# EAGLE board M220X (EAGLE 4.11)
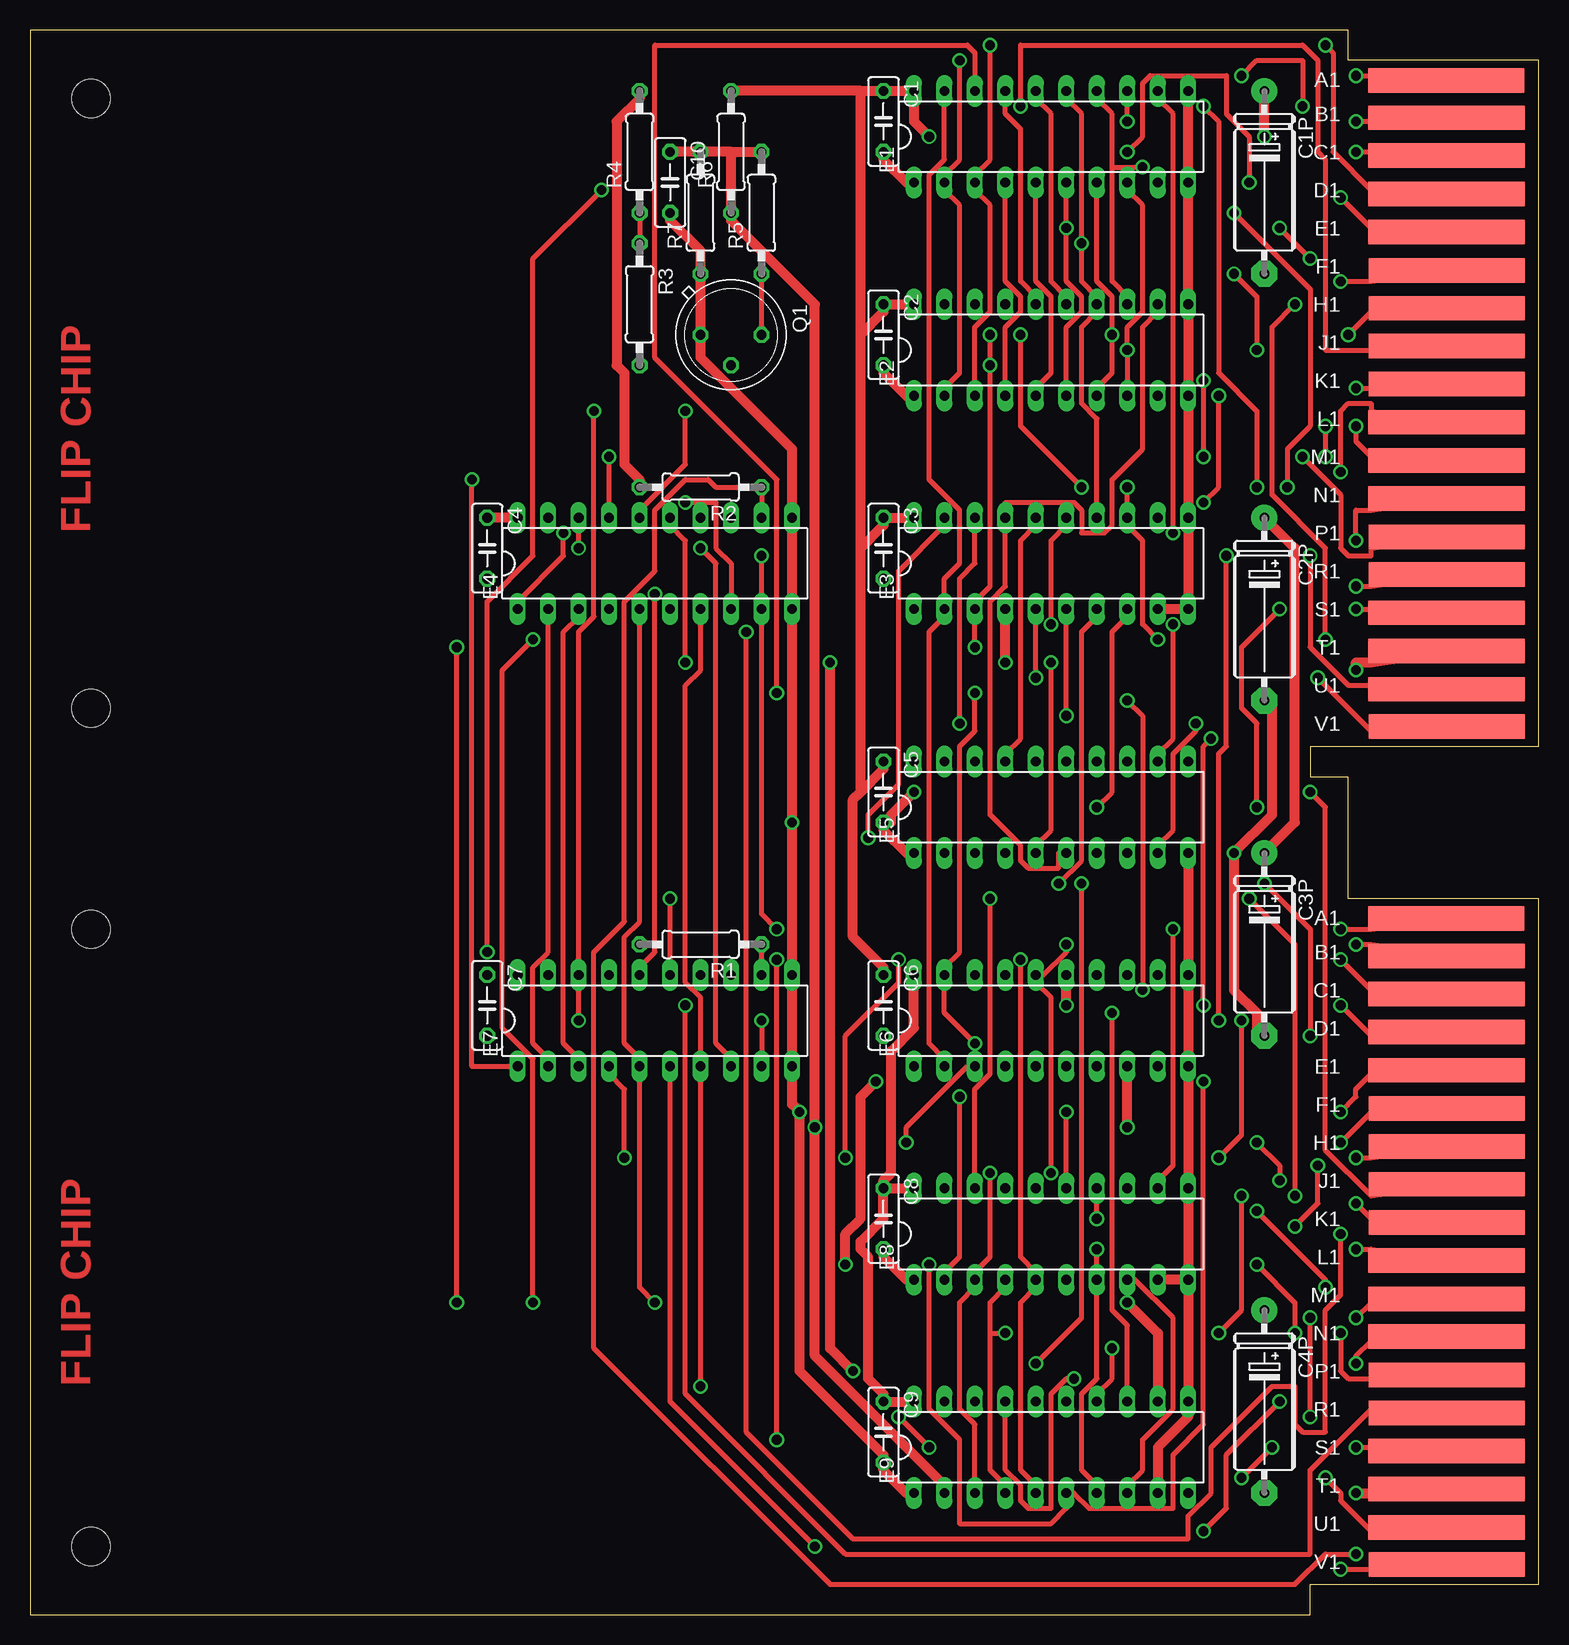
[diagram p0: board, top side]
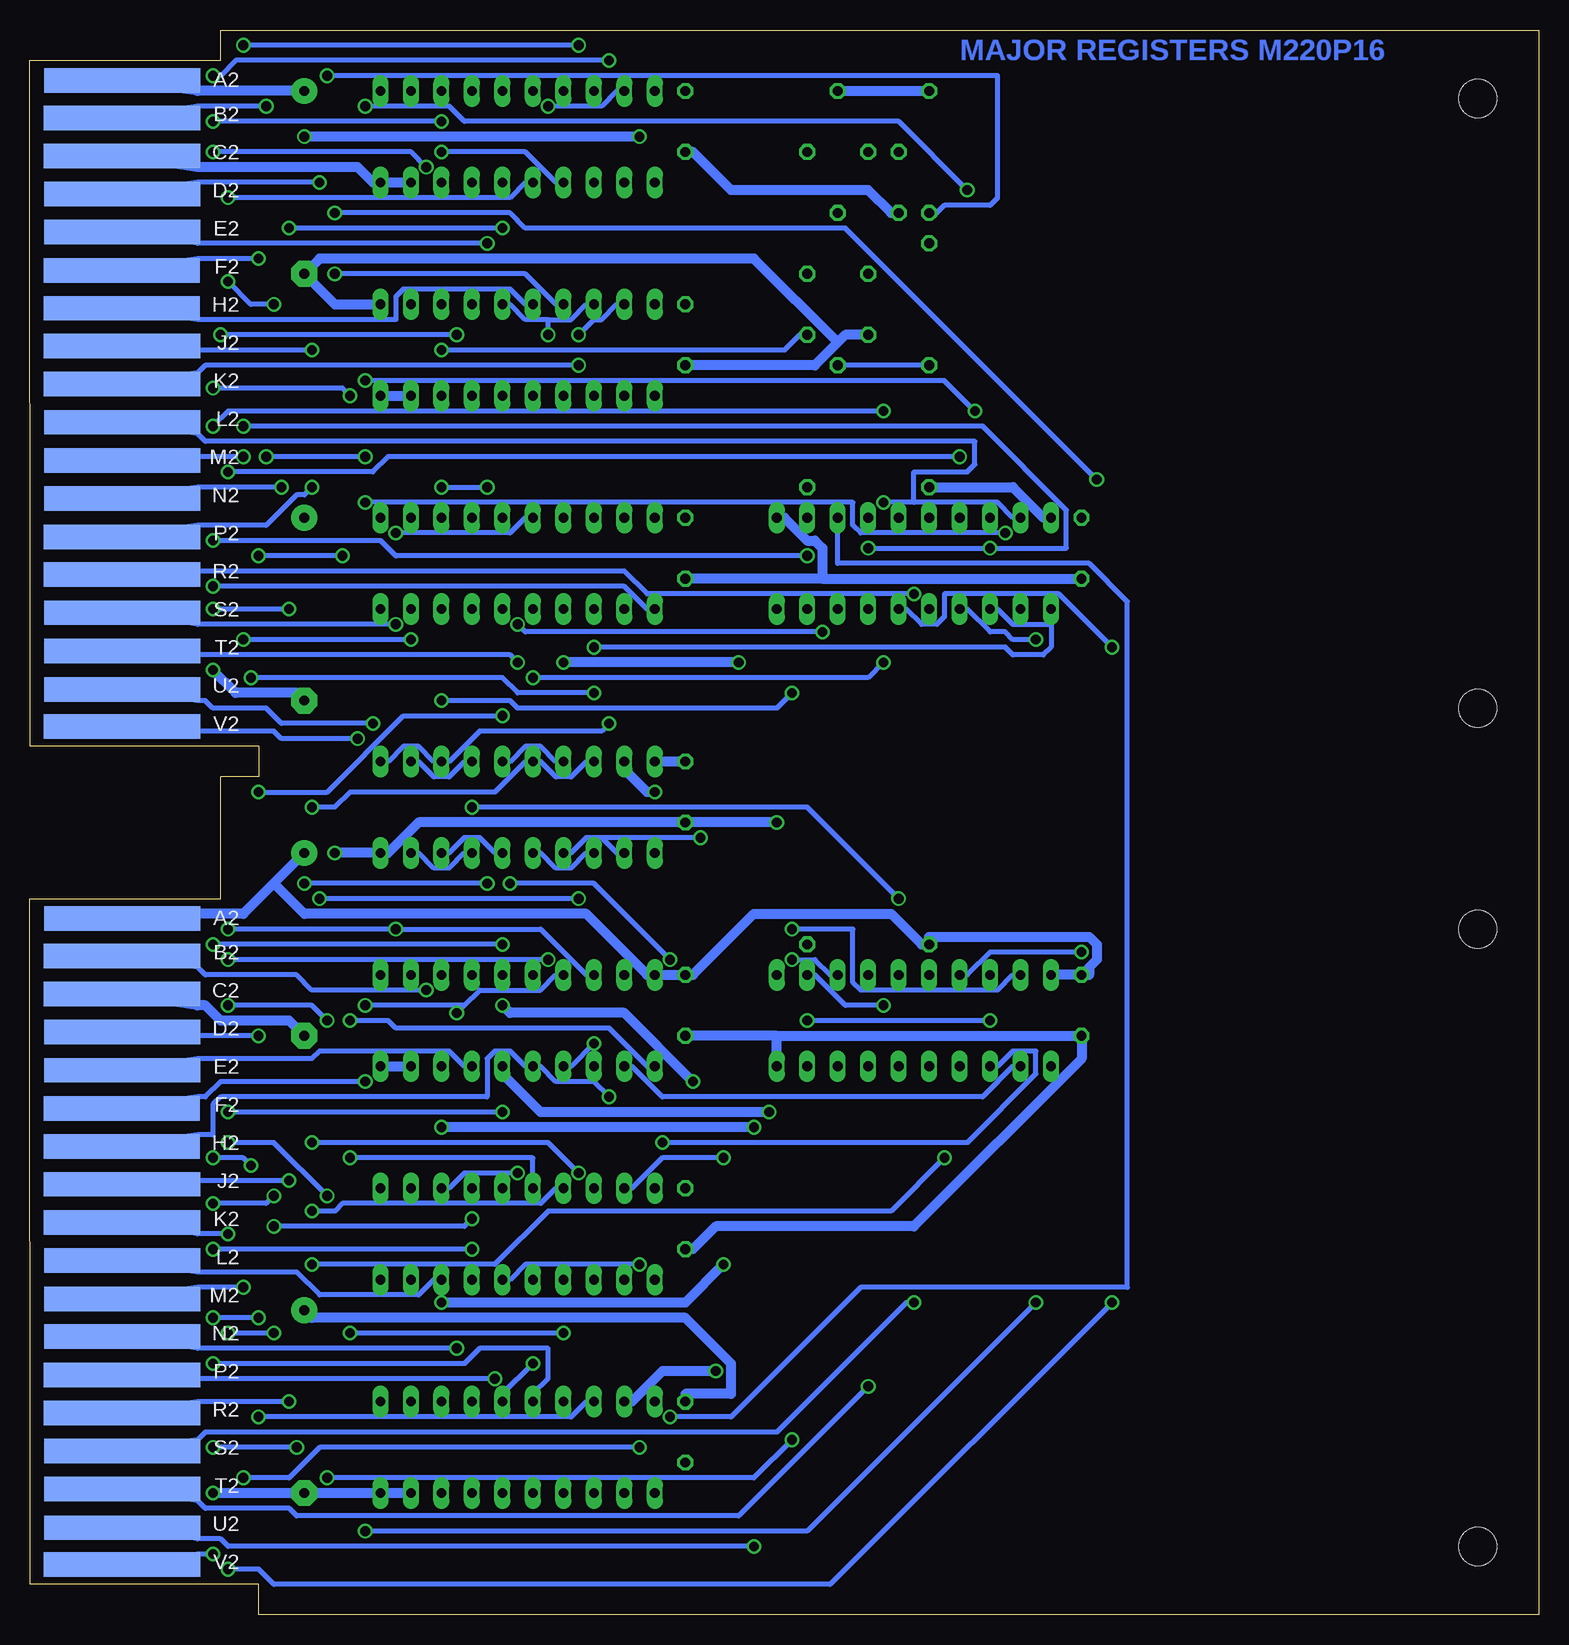
[diagram p1: board, bottom side, seen from below]

Size 125.73 x 132.08 mm. Coordinates in mm from the lower left corner, seen from the top.
Copper layers (1+16): Top 0.035mm / dielectric 1.5mm / Bottom 0.035mm
Design rules "16mils": minimum track width 16mil, minimum drill 32mil, track to track 15mil, track to pad 10mil, pad to pad 10mil, via to via 10mil, smd to smd 10mil, copper to edge 25mil, drill to drill 10mil, minimum pad ring 10mil, minimum via ring 8mil, stop-mask expansion 0mil, vias tented up to drill 0mil, thermal gap 10mil
Net classes: 1 Supply: width 0.813 mm

## Footprints (pad centres in the part's own frame; a part is rotated, then mirrored left to right if it is on the bottom)
C050-025X075 = drill 0.813 octagon: 1 -2.54,0; 2 2.54,0
E15-5 = drill 0.813 pad 2.159 round: + -7.62,0 | drill 0.813 pad 2.159 octagon: - 7.62,0
DIL20 = drill 0.813 long: 1 -11.43,-3.81; 2 -8.89,-3.81; 3 -6.35,-3.81; 4 -3.81,-3.81; 5 -1.27,-3.81; 6 1.27,-3.81; 7 3.81,-3.81; 8 6.35,-3.81; 9 8.89,-3.81; 10 11.43,-3.81; 11 11.43,3.81; 12 8.89,3.81; 13 6.35,3.81; 14 3.81,3.81; 15 1.27,3.81; 16 -1.27,3.81; 17 -3.81,3.81; 18 -6.35,3.81; 19 -8.89,3.81; 20 -11.43,3.81
TO5 = drill 0.813 octagon: 1 0,-2.54; 2 2.54,0; 3 0,2.54
0207/10 = drill 0.813 octagon: 1 -5.08,0; 2 5.08,0
EDGE-CON4 = smd 13.017 x 2.032: AA1 7.709,4.207; AB1 7.684,7.312; AC1 7.684,10.474; AD1 7.684,13.665; AE1 7.693,16.84; AF1 7.668,20.041; AH1 7.668,23.19; AJ1 7.668,26.34; AK1 7.668,29.515; AL1 7.693,32.69; AM1 7.693,35.89; AN1 7.693,39.04; AP1 7.668,42.24; AR1 7.668,45.39; AS1 7.693,48.565; AT1 7.693,51.74; AU1 7.693,54.94; AV1 7.668,58.026; BA1 7.709,74.057; BB1 7.684,77.162; BC1 7.684,80.324; BD1 7.684,83.515; BE1 7.693,86.69; BF1 7.668,89.891; BH1 7.668,93.04; BJ1 7.668,96.19; BK1 7.668,99.365; BL1 7.693,102.54; BM1 7.693,105.74; BN1 7.693,108.89; BP1 7.668,112.09; BR1 7.668,115.24; BS1 7.693,118.415; BT1 7.693,121.59; BU1 7.693,124.79; BV1 7.668,127.876 | smd 13.017 x 2.032 bottom: AA2 7.69,4.207; AB2 7.668,7.328; AC2 7.668,10.49; AD2 7.693,13.665; AE2 7.693,16.84; AF2 7.642,20.041; AH2 7.642,23.19; AJ2 7.668,26.34; AK2 7.668,29.515; AL2 7.693,32.69; AM2 7.693,35.89; AN2 7.693,39.04; AP2 7.668,42.24; AR2 7.668,45.39; AS2 7.693,48.565; AT2 7.693,51.74; AU2 7.693,54.966; AV2 7.668,58.026; BA2 7.69,74.057; BB2 7.668,77.178; BC2 7.668,80.34; BD2 7.693,83.515; BE2 7.693,86.69; BF2 7.642,89.891; BH2 7.642,93.04; BJ2 7.668,96.19; BK2 7.668,99.365; BL2 7.693,102.54; BM2 7.693,105.74; BN2 7.693,108.89; BP2 7.668,112.09; BR2 7.668,115.24; BS2 7.693,118.415; BT2 7.693,121.59; BU2 7.693,124.816; BV2 7.668,127.876
DOUBLE = hole 3.175: 120.65,56.515; 120.65,5.715; 120.65,74.93; 120.65,126.365

## Placement (x,y rotation side)
C1  0.1uf  [C050-025X075]  71.12,124.46 270 top
C1P  6.8uf  [E15-5]  102.87,119.38 270 top
C2  0.1uf  [C050-025X075]  71.12,106.68 270 top
C2P  6.8uf  [E15-5]  102.87,83.82 270 top
C3  0.1uf  [C050-025X075]  71.12,88.9 270 top
C3P  6.8uf  [E15-5]  102.87,55.88 270 top
C4  0.1uf  [C050-025X075]  38.1,88.9 270 top
C4P  6.8uf  [E15-5]  102.87,17.78 270 top
C5  0.1uf  [C050-025X075]  71.12,68.58 270 top
C6  0.1uf  [C050-025X075]  71.12,50.8 270 top
C7  0.1uf  [C050-025X075]  38.1,50.8 270 top
C8  0.1uf  [C050-025X075]  71.12,33.02 270 top
C9  0.1uf  [C050-025X075]  71.12,15.24 270 top
C10  0.1uf  [C050-025X075]  53.34,119.38 270 top
E1  M220A  [DIL20]  85.09,123.19 0 top
E2  M220A  [DIL20]  85.09,105.41 0 top
E3  M220C  [DIL20]  85.09,87.63 0 top
E4  M220B  [DIL20]  52.07,87.63 0 top
E5  74ACT240N  [DIL20]  85.09,67.31 0 top
E6  M220C  [DIL20]  85.09,49.53 0 top
E7  M220B  [DIL20]  52.07,49.53 0 top
E8  M220A  [DIL20]  85.09,31.75 0 top
E9  M220A  [DIL20]  85.09,13.97 0 top
Q1  PN3569  [TO5]  58.42,106.68 270 top
R1  180  [0207/10]  55.88,55.88 180 top
R2  180  [0207/10]  55.88,93.98 180 top
R3  3K 5%  [0207/10]  50.8,109.22 270 top
R4  3K 5%  [0207/10]  50.8,121.92 90 top
R5  3K 5%  [0207/10]  60.96,116.84 90 top
R6  330 5%  [0207/10]  58.42,121.92 90 top
R7  750 5%  [0207/10]  55.88,116.84 90 top
U$1  [EDGE-CON4]  125.73,132.08 180 top
U$2  OUTLINE-DOUBLE  [DOUBLE]  125.73,132.08 180 top
U$3  [FLIPCHIP]  0,0 0 top
U$4  [FLIPCHIP]  0,71.12 0 top

## Library data of the parts
C1 C1P C2 C2P C3 C3P C4 C4P C5-C10 R1-R7 = rcl
E1-E4 E6-E9 = pal
E5 = 74xx-us
Q1 = transistor
U$1-U$4 = dec-con

## Nets
+3V [Supply]: C10.1 E6.8 E9.2 R5.2 R6.1 R7.2
A2: E3.7 E8.19
A3 [Supply]: E3.4 E9.19
AC2_H: E6.18 E8.12 U$1.BA1
AC2_L: E6.16 E8.13 U$1.BB1
AC3_H: E6.4 E6.19 U$1.AV1
AC3_L: E6.17 E9.13 U$1.AV2
AC\_ENABL: E8.3 E9.3 U$1.BJ2
AC_ENABL: E6.5 E8.2 U$1.BH2
ADDER0: E1.13 U$1.AB1
ADDER1: E1.14 E2.13 U$1.AC1
ADDER2: E1.15 E2.14 E3.14 U$1.AE2
ADDER3: E1.16 E2.15 E2.18 E3.13 U$1.AF1
ADDER4: E1.17 E2.16 U$1.AH2
ADDER5: E2.17 U$1.AJ2
AJ1: E1.19 E3.2 E4.2 E6.2 E7.2 U$1.AJ1
AK2: E2.19 E3.3 E4.3 E6.3 E7.3 U$1.AK2
AND: E1.2 E2.2 U$1.AA1
B2: E3.8 E7.15
B3: E3.5 E4.15
BB2: E1.18 U$1.BB2
BE2: E6.7 U$1.BE2
BR2: E4.4 U$1.BR2
BV1: E4.6 U$1.BV1
C2: E3.15 U$1.BK2
CIN: E3.6 U$1.BJ1
DA2: E7.13 U$1.BS1
DA3: E4.13 U$1.BU1
DA_ENABL: E4.7 E7.7 U$1.BT2
DATA2: E8.17 U$1.BM2
DATA3: E9.17 U$1.BP2
DATA_ENABL: E8.7 E9.7 U$1.BL1
GND [Supply]: C1.2 C1P.- C2.2 C2P.- C3.2 C3P.- C4.2 C4P.- C5.2 C6.2 C7.2 C8.2 C9.2 C10.2 E1.1 E1.9 E1.10 E1.11 E2.1 E2.9 E2.10 E2.11 E3.9 E3.10 E3.11 E4.10 E4.11 E5.1 E5.10 E5.19 E6.6 E6.9 E6.10 E6.11 E7.10 E7.11 E8.1 E8.9 E8.10 E8.11 E9.1 E9.9 E9.10 E9.11 Q1.1 R7.1 U$1.AC2 U$1.AT1 U$1.BC2 U$1.BT1
IO2: E8.18 U$1.BK1
IO3: E9.18 U$1.BM1
IO_ENABL: E8.8 E9.8 U$1.BL2
MA2_H: E4.18 E7.8 U$1.AM2
MA2_L: E4.16 U$1.AM1
MA3_H: E4.8 E4.19 U$1.AL2
MA3_L: E4.17 U$1.AL1
MA_ENABL: E7.4 U$1.BP1
MB2_H: E3.18 E5.11 E5.13
MB2_L: E1.12 E3.16 E5.15 E5.17
MB3_H: E3.19 E5.2 E5.4
MB3_L: E2.12 E3.17 E5.6 E5.8
MEM2: E7.12 R1.1 U$1.BR1
MEM3: E4.12 R2.1 U$1.BV2
MEM_ENABL: E7.6 U$1.BU2
MQ2_H: E8.14 U$1.BH1
MQ3_H: E9.14 U$1.BN2
MQ_ENABL: E8.4 E9.4 U$1.BF1
N$1: E7.1 U$1.AN2
N$2: E4.1 U$1.AK1
N$3: E3.1 U$1.AR1
N$4: E6.1 U$1.AU1
N$5 [Supply]: E6.15 E9.12
N$6: E5.12 E5.14 U$1.AS2
N$7: E5.16 E5.18 U$1.AS1
N$8: E5.3 E5.5 U$1.AT2
N$9: E5.7 E5.9 U$1.AU2
N$10: Q1.2 R3.2
NO_SHIFT: E1.5 E2.5 U$1.AE1
PC2_H: E7.9 E7.18 U$1.AP1
PC2_L: E7.16 U$1.AR2
PC3_H: E4.9 E7.19 U$1.AN1
PC3_L: E7.17 U$1.AP2
PC_ENABL: E4.5 E7.5 U$1.BS2
SC2: E8.16 U$1.BD1
SC3: E9.16 U$1.BN1
SC_ENABL: E8.6 E9.6 U$1.BF2
SHIFT_L1: E1.6 E2.6 U$1.AF2
SHIFT_L2: E1.7 E2.7 U$1.AH1
SHIFT_R1: E1.4 E2.4 U$1.AD2
SHIFT_R2: E1.3 E2.3 U$1.AD1
SR2: E8.15 U$1.BE1
SR3: E9.15 U$1.BD2
SR_ENABL: E8.5 E9.5 U$1.BC1
TT_SHIFT: E1.8 E2.8 Q1.3 R5.1
TT_SHIFT_L: R3.1 R4.1 U$1.AB2
VCC [Supply]: C1.1 C1P.+ C2.1 C2P.+ C3.1 C3P.+ C4.1 C4P.+ C5.1 C6.1 C7.1 C8.1 C9.1 E1.20 E2.20 E3.20 E4.20 E5.20 E6.20 E7.20 E8.20 E9.20 R1.2 R2.2 R4.2 R6.2 U$1.AA2 U$1.BA2

## Tracks (layer width: path | path; a pad name or v marks a point on that pad's centre or on a via)
+3V  (via drill 0.81)
  Top 0.813: C10.1 R7.2 58.42,121.92 | 58.42,121.92 R5.2 | E9.2 76.2,10.79 65.41,21.59 v65.41,40.64 65.41,109.22 58.42,116.2 R6.1 58.42,121.92 | v91.44,40.64 E6.8
  Bottom 0.813: v65.41,40.64 v91.44,40.64
A2  (via drill 0.81)
  Top 0.406: v67.94,38.1 67.94,48.26 72.39,52.7 v72.39,54.61 | v85.72,60.96 87.63,62.87 87.63,81.92 88.9,83.19 E3.7
  Bottom 0.406: v67.94,38.1 73.03,38.1 75.56,35.56 E8.19 | v72.39,54.61 78.74,60.96 v85.72,60.96
A3  (via drill 0.81)
  Top 0.813: v68.58,20.32 66.67,22.23 v66.67,79.38 | v81.28,79.38 E3.4
  Bottom 0.813: v68.58,20.32 73.03,20.32 75.56,17.78 E9.19 | v66.67,79.38 v81.28,79.38
AC2_H  (via drill 0.81)
  Top 0.406: v109.22,57.15 111.76,57.15 U$1.BA1 | v95.25,57.15 95.25,37.47 93.98,36.2 E8.12
  Bottom 0.406: v109.22,57.15 v95.25,57.15 83.19,57.15 79.38,53.34 E6.18
AC2_L  (via drill 0.81)
  Top 0.406: v85.09,36.83 85.09,51.44 83.82,52.7 E6.16 84.45,53.34 86.36,55.24 v86.36,55.88 | v110.49,55.88 111.76,55.88 U$1.BB1
  Bottom 0.406: v85.09,36.83 89.53,36.83 90.81,35.56 E8.13 | v86.36,55.88 v110.49,55.88
AC3_H  (via drill 0.81)
  Top 0.406: v78.74,47.62 76.2,50.16 E6.19 76.2,53.98 77.47,55.24 77.47,72.39 78.74,73.66 v78.74,76.83 | v107.31,78.11 111.76,73.66 U$1.AV1
  Bottom 0.406: v78.74,47.62 80.64,45.72 E6.4 | v78.74,76.83 85.09,76.83 86.36,78.11 v107.31,78.11
AC3_L  (via drill 0.81)
  Top 0.406: v90.17,50.16 90.17,25.4 91.44,24.13 E9.13 | v98.42,73.03 97.79,72.39 v97.79,50.8
  Bottom 0.406: 89.53,50.8 88.27,52.07 83.19,52.07 81.92,53.34 E6.17 | v90.17,50.16 89.53,50.8 | v98.42,73.03 104.78,73.03 105.41,73.66 111.76,73.66 U$1.AV2 | 89.53,50.8 v97.79,50.8
AC\_ENABL  (via drill 0.81)
  Top 0.406: E9.3 78.74,15.88 77.47,17.14 77.47,26.04 78.74,27.3 E8.3 78.74,28.57 80.01,29.84 v80.01,36.83 | v102.23,39.37 104.14,37.47 v104.14,36.2
  Bottom 0.406: v80.01,36.83 82.55,39.37 v102.23,39.37 | v104.14,36.2 111.76,36.2 U$1.BJ2
AC_ENABL  (via drill 0.81)
  Top 0.406: v77.47,43.18 77.47,29.84 76.2,28.57 E8.2
  Bottom 0.406: v77.47,43.18 78.74,44.45 81.92,44.45 83.19,45.72 E6.5 84.45,45.72 85.72,46.99 87,46.99 87.63,46.35 87.63,43.18 109.86,43.18 110.49,42.55 110.49,40.01 111.76,40.01 U$1.BH2
ADDER0  (via drill 0.81)
  Top 0.406: v110.49,124.46 111.76,124.46 U$1.AB1 | v91.44,124.46 E1.13
  Bottom 0.406: v91.44,124.46 v110.49,124.46
ADDER1  (via drill 0.81)
  Top 0.406: 90.17,120.65 90.17,125.09 88.9,126.36 E1.14 | 90.17,120.65 90.17,111.12 91.44,109.86 E2.13 | 90.17,120.65 v92.71,120.65 | v110.49,121.92 111.76,121.92 U$1.AC1
  Bottom 0.406: v92.71,120.65 93.98,121.92 v110.49,121.92
ADDER2  (via drill 0.81)
  Top 0.406: E3.14 88.9,99.69 87.63,100.97 87.63,107.31 88.9,108.58 E2.14 88.9,109.86 87.63,111.12 v87.63,114.3 87.63,125.09 86.36,126.36 E1.15
  Bottom 0.406: v87.63,114.3 111.76,114.3 U$1.AE2
ADDER3  (via drill 0.81)
  Top 0.406: v87.63,93.98 82.55,99.06 v82.55,106.68 | v91.44,93.98 E3.13 91.44,90.81 92.71,89.53 92.71,82.55 v93.98,81.28 | E1.16 83.82,126.36 85.09,125.09 85.09,111.12 86.36,109.86 E2.15 | v109.22,111.12 111.76,111.12 U$1.AF1 | v105.41,109.22 103.5,107.31 103.5,93.34 107.95,88.9 v107.95,81.28
  Bottom 0.406: 82.55,107.95 84.45,107.95 85.72,109.22 E2.15 | 82.55,107.95 80.64,107.95 79.38,109.22 E2.18 | v91.44,93.98 v87.63,93.98 | v82.55,106.68 82.55,107.95 | v109.22,111.12 107.31,109.22 v105.41,109.22 | v93.98,81.28 v107.95,81.28
ADDER4
  Top 0.406: E2.16 83.82,109.86 82.55,111.12 82.55,123.83 81.28,125.09 E1.17
  Bottom 0.406: E2.16 84.45,109.22 85.72,110.49 94.61,110.49 95.25,109.86 95.25,107.95 111.76,107.95 U$1.AH2
ADDER5  (via drill 0.81)
  Top 0.406: v100.33,111.76 102.23,109.86 v102.23,105.41
  Bottom 0.406: v100.33,111.76 84.45,111.76 81.92,109.22 E2.17 | v102.23,105.41 111.76,105.41 U$1.AJ2
AJ1  (via drill 0.81)
  Top 0.406: E4.2 43.18,55.24 41.91,53.98 41.91,47.62 43.18,46.35 E7.2 | E6.2 76.2,46.35 74.93,47.62 74.93,81.92 76.2,83.19 E3.2 76.2,86.36 77.47,87.63 77.47,92.08 74.93,94.61 74.93,120.02 76.2,121.28 E1.19 | v82.55,125.73 82.55,130.81 106.05,130.81 107.31,129.54 107.31,121.92 107.95,121.28 107.95,105.41 111.76,105.41 U$1.AJ1
  Bottom 0.406: E7.2 43.81,45.72 46.35,43.18 73.03,43.18 75.56,45.72 E6.2 | v82.55,125.73 78.11,125.73 76.83,127 E1.19
AK2  (via drill 0.81)
  Top 0.406: v80.01,106.68 v80.01,104.14 80.01,85.72 78.74,84.45 E3.3 v78.74,80.64 | E7.3 45.72,46.35 44.45,47.62 44.45,81.92 45.72,83.19 E4.3 | v73.03,39.37 73.03,40.64 78.11,45.72 E6.3
  Bottom 0.406: v80.01,106.68 78.74,107.95 78.11,107.95 76.83,109.22 E2.19 | v80.01,104.14 111.12,104.14 111.76,103.5 U$1.AK2 | v73.03,39.37 47.62,39.37 41.91,45.09 41.91,46.99 43.81,46.99 45.09,45.72 E7.3 | v78.74,80.64 44.45,80.64 43.81,80.01 41.27,80.01 40.64,80.64 40.64,82.55 43.81,82.55 45.09,83.82 E4.3
AND  (via drill 0.81)
  Top 0.406: E2.2 76.2,102.23 77.47,103.5 77.47,117.47 76.2,118.75 E1.2 76.2,120.02 77.47,121.28 v77.47,129.54 | v110.49,128.27 111.76,128.27 U$1.AA1
  Bottom 0.406: v77.47,129.54 108.58,129.54 109.86,128.27 v110.49,128.27
B2  (via drill 0.81)
  Top 0.406: v88.9,67.31 90.17,68.58 90.17,81.92 91.44,83.19 E3.8 | E7.15 v53.34,59.69
  Bottom 0.406: v53.34,59.69 60.96,67.31 v88.9,67.31
B3  (via drill 0.81)
  Top 0.406: v54.61,79.38 54.61,89.53 53.34,90.81 E4.15 | v83.82,78.11 E3.5
  Bottom 0.406: v54.61,79.38 55.88,78.11 v83.82,78.11
BB2  (via drill 0.81)
  Top 0.406: v62.23,76.83 62.23,94.61 52.07,104.78 52.07,130.81 78.11,130.81 78.74,130.18 E1.18 | v91.44,76.2 92.71,74.93 v92.71,52.07
  Bottom 0.406: v62.23,76.83 63.5,75.56 85.09,75.56 85.72,76.2 v91.44,76.2 | v92.71,52.07 102.23,52.07 103.5,53.34 111.12,53.34 111.76,53.98 U$1.BB2
BE2
  Bottom 0.406: E6.7 89.53,45.72 90.81,46.99 101.6,46.99 102.23,46.35 111.76,46.35 U$1.BE2
BR2  (via drill 0.81)
  Top 0.406: v41.91,81.28 39.37,78.74 39.37,48.9 41.91,46.35 v41.91,26.04 | v97.79,6.99 99.69,8.89 99.69,13.34 v104.14,17.78
  Bottom 0.406: v41.91,81.28 43.81,81.28 44.45,81.92 45.72,81.92 47.62,83.82 E4.4 | v41.91,26.04 60.96,6.99 v97.79,6.99 | v104.14,17.78 111.76,17.78 U$1.BR2
BV1  (via drill 0.81)
  Top 0.406: v35.56,26.04 v35.56,80.64 | v109.22,3.81 111.76,3.81 U$1.BV1
  Bottom 0.406: v35.56,80.64 40.01,85.09 49.53,85.09 49.53,83.19 50.16,82.55 51.44,82.55 52.7,83.82 E4.6 | v35.56,26.04 59.05,2.54 105.41,2.54 106.68,3.81 v109.22,3.81
C2  (via drill 0.81)
  Top 0.406: v85.09,82.55 85.09,89.53 86.36,90.81 E3.15 | v59.69,81.92 59.69,15.24 68.58,6.35 96.52,6.35 96.52,8.26 98.42,10.16 98.42,13.97 103.5,19.05 105.41,19.05 105.41,15.88 106.05,15.24 107.95,15.24 107.95,25.4 109.22,26.67 v109.22,31.75
  Bottom 0.406: v85.09,82.55 84.45,81.92 v59.69,81.92 | v109.22,31.75 111.76,31.75 U$1.BK2
CIN  (via drill 0.81)
  Top 0.406: v106.68,68.58 107.95,67.31 107.95,38.73 111.76,34.92 U$1.BJ1 | v86.36,74.93 E3.6
  Bottom 0.406: v86.36,74.93 94.61,74.93 100.97,68.58 v106.68,68.58
DA2  (via drill 0.81)
  Top 0.406: v62.23,14.61 v62.23,54.61 | v100.97,11.43 v103.5,13.97 | v110.49,13.97 111.76,13.97 U$1.BS1
  Bottom 0.406: v62.23,54.61 60.33,54.61 59.05,53.34 E7.13 | v62.23,14.61 65.41,11.43 v100.97,11.43 | v103.5,13.97 v110.49,13.97
DA3  (via drill 0.81)
  Top 0.406: v72.39,16.51 v74.93,13.97 | v107.95,11.43 109.22,10.16 109.22,9.53 111.76,6.99 U$1.BU1
  Bottom 0.406: v72.39,16.51 67.31,16.51 56.52,27.3 34.29,27.3 34.29,84.45 37.47,87.63 58.42,87.63 E4.13 | v74.93,13.97 101.6,13.97 104.14,11.43 v107.95,11.43
DA_ENABL  (via drill 0.81)
  Top 0.406: E4.7 55.88,78.74 54.61,77.47 54.61,52.7 55.88,51.44 E7.7 v55.88,19.05
  Bottom 0.406: v55.88,19.05 66.67,8.26 103.5,8.26 104.14,8.89 111.12,8.89 111.76,9.53 U$1.BT2
DATA2  (via drill 0.81)
  Top 0.406: v102.23,33.66 107.95,27.94 v107.95,27.3
  Bottom 0.406: v102.23,33.66 100.33,33.66 99.69,34.29 83.19,34.29 81.92,35.56 E8.17 | v107.95,27.3 111.76,27.3 U$1.BM2
DATA3  (via drill 0.81)
  Top 0.406: v87,19.68 86.36,19.68 85.09,18.41 85.09,8.89 83.19,8.89 82.55,9.53 82.55,10.79 81.28,12.06 E9.17
  Bottom 0.406: v87,19.68 111.76,19.68 U$1.BP2
DATA_ENABL  (via drill 0.81)
  Top 0.406: E9.7 88.9,10.79 87.63,12.06 87.63,18.41 88.9,19.68 E8.7 v88.9,30.48 | v110.49,30.48 111.76,30.48 U$1.BL1
  Bottom 0.406: v88.9,30.48 v110.49,30.48
GND  (via drill 0.81)
  Top 0.813: C2P.- 103.5,75.56 103.5,66.67 v100.33,63.5 100.33,52.07 102.23,50.16 102.23,48.9 C3P.- | v110.49,78.74 110.49,79.38 111.76,79.38 U$1.AT1 | E5.1 73.03,63.5 71.12,65.41 C5.2 71.75,66.04 71.75,66.67 v73.66,68.58 | E5.10 E6.11 E6.10 E8.11 E8.10 | E8.10 E8.9 | E8.10 E9.11 96.52,16.51 93.98,13.97 E9.9 | v110.49,10.16 111.76,10.16 U$1.BT1 | E1.11 E1.10 E2.11 E2.10 E3.11 E3.10 E3.9 | E1.1 73.03,119.38 71.12,121.28 C1.2 | C2.2 71.12,103.5 73.03,101.6 E2.1 | C10.2 53.34,116.2 55.88,113.67 R7.1 Q1.1 55.88,104.78 63.5,97.16 E4.11 E4.10 v63.5,66.04 E7.11 E7.10 63.5,42.55 v64.14,41.91 64.14,20.32 71.12,13.34 C9.2 71.12,12.06 73.03,10.16 E9.1 | E8.1 73.03,27.94 71.12,29.84 C8.2
  Bottom 0.813: C3P.- 104.14,49.53 109.86,49.53 111.12,50.8 111.76,50.8 U$1.BC2 | v110.49,78.74 108.58,76.83 103.5,76.83 C2P.- | v73.66,68.58 74.3,68.58 76.2,70.48 E5.19 | E6.10 E6.9 | E9.9 E9.10 C4P.- v110.49,10.16 | v100.33,63.5 E5.10 95.89,63.5 93.34,66.04 C5.2 v63.5,66.04 | E1.9 E1.10 97.16,119.38 98.42,120.65 111.76,120.65 U$1.AC2 | E2.10 E2.9 | E2.11 100.33,109.22 C1P.- 101.6,113.03 65.41,113.03 58.42,106.05 | 59.69,86.36 C4.2 | 59.69,86.36 C3.2 | 59.69,86.36 59.69,88.9 60.33,89.53 60.96,89.53 62.87,91.44 E4.11 | 58.42,106.05 57.78,106.68 Q1.1 | 58.42,106.05 60.33,104.14 C2.2 | C1.2 70.48,121.92 67.31,118.75 55.88,118.75 53.98,116.84 C10.2 | 63.5,48.26 C7.2 38.1,46.35 52.07,32.38 68.58,32.38 70.48,30.48 C8.2 | 63.5,48.26 C6.2 | v64.14,41.91 83.19,41.91 86.36,45.09 E6.6 | E7.10 63.5,48.26
IO2  (via drill 0.81)
  Top 0.406: v80.01,59.69 80.01,45.09 78.74,43.81 E8.18 | v101.6,59.69 105.41,55.88 v105.41,34.92 | v110.49,34.29 111.76,33.02 U$1.BK1
  Bottom 0.406: v80.01,59.69 v101.6,59.69 | v105.41,34.92 106.05,34.29 v110.49,34.29
IO3  (via drill 0.81)
  Top 0.406: v106.68,16.51 v106.68,24.77 | v110.49,24.77 111.76,26.04 U$1.BM1
  Bottom 0.406: v106.68,16.51 80.64,16.51 79.38,17.78 E9.18 | v106.68,24.77 v110.49,24.77
IO_ENABL
  Top 0.406: E9.8 91.44,10.79 92.71,12.06 92.71,14.61 95.25,17.14 95.25,24.77 92.08,27.94 E8.8
  Bottom 0.406: E8.8 92.08,27.94 93.34,26.67 101.6,26.67 103.5,28.57 111.76,28.57 U$1.BL2
MA2_H  (via drill 0.81)
  Top 0.406: v55.88,88.9 57.15,87.63 57.15,47.62 58.42,46.35 E7.8 | v45.72,88.9 E4.18 | v107.95,99.06 v107.95,96.52
  Bottom 0.406: v55.88,88.9 v45.72,88.9 39.37,88.9 39.37,92.08 46.35,99.06 v107.95,99.06 | v107.95,96.52 111.76,96.52 U$1.AM2
MA2_L  (via drill 0.81)
  Top 0.406: v54.61,100.33 54.61,95.89 50.8,92.08 E4.16 | v110.49,99.06 110.49,97.79 111.76,96.52 U$1.AM1
  Bottom 0.406: v54.61,100.33 109.22,100.33 v110.49,99.06
MA3_H  (via drill 0.81)
  Top 0.406: v54.61,92.71 57.15,92.71 57.15,88.9 58.42,87.63 E4.8
  Bottom 0.406: 52.07,92.71 v54.61,92.71 | 52.07,92.71 45.09,92.71 43.81,91.44 E4.19 | 52.07,92.71 52.07,95.25 47.62,95.25 46.99,95.89 46.99,97.79 111.12,97.79 111.76,98.42 U$1.AL2
MA3_L  (via drill 0.81)
  Top 0.406: v109.22,95.25 109.22,100.33 109.86,100.97 111.76,100.97 111.76,100.33 U$1.AL1 | E4.17 v48.26,96.52
  Bottom 0.406: v48.26,96.52 95.89,96.52 97.16,95.25 v109.22,95.25
MA_ENABL  (via drill 0.81)
  Top 0.406: v49.53,38.1 49.53,43.81 48.26,45.09 E7.4 | v102.23,29.21 105.41,26.04 v105.41,23.5 | v109.22,23.5 109.22,20.32 109.86,19.68 111.76,19.68 U$1.BP1
  Bottom 0.406: v49.53,38.1 53.98,33.66 82.55,33.66 87,29.21 v102.23,29.21 | v105.41,23.5 v109.22,23.5
MB2_H  (via drill 0.81)
  Top 0.406: v77.47,74.3 77.47,86.36 78.74,87.63 E3.18
  Bottom 0.406: E5.11 95.89,71.12 94.61,72.39 93.34,72.39 92.08,71.12 E5.13 90.81,71.12 88.27,73.66 78.11,73.66 v77.47,74.3
MB2_L  (via drill 0.81)
  Top 0.406: E3.16 83.82,90.81 82.55,89.53 82.55,73.03 81.28,71.75 E5.17 | v95.25,90.17 95.25,125.09 93.98,126.36 E1.12
  Bottom 0.406: E5.17 81.92,71.12 83.19,72.39 84.45,72.39 85.72,71.12 E5.15 | v95.25,90.17 85.72,90.17 84.45,91.44 E3.16
MB3_H  (via drill 0.81)
  Top 0.406: v69.85,64.77 69.85,66.67 72.39,69.22 72.39,87 76.2,90.81 E3.19
  Bottom 0.406: 78.11,64.77 76.83,63.5 E5.2 | 78.11,64.77 79.38,64.77 80.64,63.5 E5.4 | v69.85,64.77 78.11,64.77
MB3_L
  Top 0.406: E5.6 85.72,63.5 85.72,62.23 83.19,62.23 82.55,62.87 82.55,64.14 80.01,66.67 80.01,84.45 81.28,85.72 E3.17 81.28,92.71 87,92.71 87.63,92.08 87.63,90.17 89.53,90.17 90.17,90.81 90.17,94.61 92.71,97.16 92.71,107.31 93.98,108.58 E2.12
  Bottom 0.406: E5.8 90.81,63.5 89.53,64.77 88.27,64.77 87,63.5 E5.6
MEM2  (via drill 0.81)
  Top 0.406: E7.12 R1.1 | v54.61,50.8 54.61,18.41 67.94,5.08 106.68,5.08 106.68,12.06 111.76,17.14 U$1.BR1
  Bottom 0.406: v54.61,50.8 57.78,50.8 60.33,53.34 E7.12
MEM3  (via drill 0.81)
  Top 0.406: E4.12 R2.1 57.15,93.98 56.52,94.61 54.61,94.61 52.07,92.08 52.07,87 49.53,84.45 49.53,57.78 46.99,55.24 46.99,22.23 66.67,2.54 105.41,2.54 107.95,5.08 v110.49,5.08
  Bottom 0.406: v110.49,5.08 111.76,5.08 U$1.BV2
MEM_ENABL  (via drill 0.81)
  Top 0.406: v65.41,5.71 53.34,17.78 E7.6
  Bottom 0.406: v65.41,5.71 109.22,5.71 109.86,6.35 111.76,6.35 U$1.BU2
MQ2_H  (via drill 0.81)
  Top 0.406: v105.41,32.38 107.31,34.29 v107.31,37.47 | v110.49,38.1 111.76,38.1 U$1.BH1 | v88.9,33.02 E8.14
  Bottom 0.406: v88.9,33.02 89.53,32.38 v105.41,32.38 | v107.31,37.47 107.95,38.1 v110.49,38.1
MQ3_H  (via drill 0.81)
  Top 0.406: v90.17,22.23 90.17,19.68 88.9,18.41 E9.14
  Bottom 0.406: v90.17,22.23 111.76,22.23 U$1.BN2
MQ_ENABL  (via drill 0.81)
  Top 0.406: 80.01,23.5 80.01,26.04 81.28,27.3 E8.4 | 80.01,23.5 80.01,12.06 81.28,10.79 E9.4 | 80.01,23.5 v81.28,23.5 | v99.06,23.5 100.97,25.4 v100.97,34.92 | v109.22,39.37 111.76,41.91 U$1.BF1
  Bottom 0.406: v81.28,23.5 v99.06,23.5 | v100.97,34.92 105.41,39.37 v109.22,39.37
N$1  (via drill 0.81)
  Top 0.406: v36.83,94.61 36.83,45.72 E7.1 | v100.33,116.84 106.68,110.49 106.68,99.06 104.78,97.16 v104.78,93.98
  Bottom 0.406: v36.83,94.61 57.78,115.57 84.45,115.57 85.72,116.84 v100.33,116.84 | v104.78,93.98 111.76,93.98 U$1.AN2
N$2  (via drill 0.81)
  Top 0.406: v44.45,90.17 44.45,88.27 40.64,84.45 E4.1 | v97.79,92.71 99.06,93.98 v99.06,101.6 | v110.49,102.23 111.76,102.23 U$1.AK1
  Bottom 0.406: v44.45,90.17 56.52,90.17 57.15,90.81 57.15,92.71 v97.79,92.71 | v99.06,101.6 99.69,102.23 v110.49,102.23
N$3  (via drill 0.81)
  Top 0.406: v110.49,85.72 111.76,85.72 U$1.AR1
  Bottom 0.406: v110.49,85.72 76.2,85.72 74.3,83.82 E3.1
N$4  (via drill 0.81)
  Top 0.406: v99.06,49.53 99.06,71.75 99.69,72.39 v99.69,88.27 | v106.68,88.27 106.68,80.64 109.86,77.47 111.76,77.47 U$1.AU1
  Bottom 0.406: v99.06,49.53 95.89,49.53 95.25,48.9 77.47,48.9 74.3,45.72 E6.1 | v99.69,88.27 v106.68,88.27
N$5  (via drill 0.81)
  Top 0.813: v70.48,44.45 69.22,43.18 69.22,33.02 67.94,31.75 v67.94,29.21 | v91.44,26.04 93.98,23.5 E9.12 | v86.36,50.8 E6.15
  Bottom 0.813: v86.36,50.8 85.72,50.16 76.2,50.16 v70.48,44.45 | v67.94,29.21 71.12,26.04 v91.44,26.04
N$6  (via drill 0.81)
  Top 0.406: v95.25,82.55 95.25,73.03 93.98,71.75 E5.12
  Bottom 0.406: E5.14 89.53,71.12 90.81,69.85 92.08,69.85 93.34,71.12 E5.12 | v95.25,82.55 111.76,82.55 U$1.AS2
N$7  (via drill 0.81)
  Top 0.406: v102.23,67.31 102.23,74.3 100.97,75.56 100.97,80.64 v104.14,83.82 | v110.49,83.82 111.76,83.82 U$1.AS1
  Bottom 0.406: E5.18 79.38,71.12 80.64,69.85 81.92,69.85 83.19,71.12 E5.16 84.45,71.12 87,68.58 99.06,68.58 100.33,67.31 v102.23,67.31 | v104.14,83.82 v110.49,83.82
N$8  (via drill 0.81)
  Top 0.406: v85.09,79.38 85.09,65.41 83.82,64.14 E5.5
  Bottom 0.406: E5.3 79.38,63.5 80.64,62.23 81.92,62.23 83.19,63.5 E5.5 | v85.09,79.38 85.72,80.01 111.76,80.01 U$1.AT2
N$9  (via drill 0.81)
  Top 0.406: v97.16,74.3 97.16,73.66 95.25,71.75 95.25,65.41 93.98,64.14 E5.9
  Bottom 0.406: E5.7 89.53,63.5 90.81,62.23 92.08,62.23 93.34,63.5 E5.9 | v97.16,74.3 104.78,74.3 106.05,75.56 110.49,75.56 111.12,76.2 111.76,76.2 U$1.AU2
N$10
  Bottom 0.406: R3.2 Q1.2
NO_SHIFT  (via drill 0.81)
  Top 0.406: E2.5 83.82,102.23 85.09,103.5 85.09,109.86 83.82,111.12 E1.5 | v109.22,118.11 111.76,115.57 U$1.AE1
  Bottom 0.406: v109.22,118.11 85.72,118.11 84.45,119.38 E1.5
PC2_H  (via drill 0.81)
  Top 0.406: v60.96,49.53 E7.9 | v45.72,49.53 E7.18 45.72,81.92 46.99,83.19 v46.99,100.33 | v97.79,102.87 v97.79,96.52 | v106.05,96.52 109.22,93.34 109.22,88.9 109.86,88.27 111.76,88.27 111.76,88.9 U$1.AP1
  Bottom 0.406: v45.72,49.53 v60.96,49.53 | v46.99,100.33 49.53,102.87 v97.79,102.87 | v97.79,96.52 v106.05,96.52
PC2_L  (via drill 0.81)
  Top 0.406: v52.07,85.09 52.07,55.24 50.8,53.98 E7.16
  Bottom 0.406: v52.07,85.09 74.3,85.09 76.2,87 111.76,87 U$1.AR2
PC3_H  (via drill 0.81)
  Top 0.406: v62.23,57.15 60.96,58.42 E4.9 v60.96,88.27 | v110.49,89.53 110.49,92.08 111.76,92.08 U$1.AN1
  Bottom 0.406: v62.23,57.15 57.15,57.15 57.15,52.7 56.52,52.07 45.09,52.07 43.81,53.34 E7.19 | v110.49,89.53 96.52,89.53 95.25,88.27 v60.96,88.27
PC3_L  (via drill 0.81)
  Top 0.406: v38.1,55.24 38.1,84.45 41.91,88.27 41.91,113.03 v47.62,118.75 | v97.79,125.73 99.06,124.46 99.06,103.5 102.23,100.33 v102.23,93.98
  Bottom 0.406: v38.1,55.24 45.72,55.24 47.62,53.34 E7.17 | v47.62,118.75 53.34,124.46 89.53,124.46 90.81,125.73 v97.79,125.73 | v102.23,93.98 102.87,93.34 103.5,93.34 106.05,90.81 111.76,90.81 U$1.AP2
PC_ENABL  (via drill 0.81)
  Top 0.406: E4.5 50.8,57.78 49.53,56.52 49.53,47.62 50.8,46.35 E7.5 50.8,27.3 v52.07,26.04
  Bottom 0.406: v52.07,26.04 52.7,26.04 63.5,15.24 111.12,15.24 111.76,14.61 U$1.BS2
SC2  (via drill 0.81)
  Top 0.406: v99.06,38.1 100.97,40.01 v100.97,49.53 | v109.22,50.8 111.76,48.26 U$1.BD1
  Bottom 0.406: v99.06,38.1 83.82,38.1 E8.16 | v100.97,49.53 102.23,50.8 v109.22,50.8
SC3  (via drill 0.81)
  Top 0.406: v110.49,20.95 110.49,21.59 111.76,22.86 U$1.BN1
  Bottom 0.406: v110.49,20.95 89.53,20.95 88.27,22.23 82.55,22.23 82.55,19.68 83.82,18.41 E9.16
SC_ENABL  (via drill 0.81)
  Top 0.406: v74.93,29.21 74.93,17.14 77.47,14.61 77.47,7.62 85.09,7.62 86.36,8.89 E9.6 87,10.16 88.27,8.89 95.25,8.89 95.25,13.34 97.79,15.88 v97.79,44.45
  Bottom 0.406: v74.93,29.21 84.45,29.21 85.72,27.94 E8.6 | v97.79,44.45 109.86,44.45 111.12,43.18 111.76,43.18 U$1.BF2
SHIFT_L1  (via drill 0.81)
  Top 0.406: E2.6 86.36,107.31 87.63,108.58 87.63,109.86 86.36,111.12 v86.36,115.57 E1.6 | v104.14,115.57 v106.68,113.03
  Bottom 0.406: v86.36,115.57 v104.14,115.57 | v106.68,113.03 111.76,113.03 U$1.AF2
SHIFT_L2  (via drill 0.81)
  Top 0.406: E2.7 88.9,102.23 90.17,103.5 v90.17,106.68 90.17,109.86 88.9,111.12 E1.7 | v109.86,106.68 111.76,108.58 U$1.AH1
  Bottom 0.406: v90.17,106.68 v109.86,106.68
SHIFT_R1  (via drill 0.81)
  Top 0.406: E2.4 81.28,107.31 82.55,108.58 82.55,109.86 81.28,111.12 E1.4 | v91.44,121.92 92.71,123.19 92.71,127.64 93.34,128.27 99.69,128.27 99.69,125.09 101.6,123.19 v101.6,119.38
  Bottom 0.406: v91.44,121.92 84.45,121.92 81.92,119.38 E1.4 | v101.6,119.38 111.76,119.38 U$1.AD2
SHIFT_R2  (via drill 0.81)
  Top 0.406: E2.3 78.74,107.31 80.01,108.58 80.01,117.47 78.74,118.75 E1.3 78.74,120.02 80.01,121.28 v80.01,130.81 | v107.95,130.81 108.58,130.18 108.58,121.92 111.76,118.75 U$1.AD1
  Bottom 0.406: v80.01,130.81 v107.95,130.81
SR2  (via drill 0.81)
  Top 0.406: v109.22,41.91 110.49,43.18 110.49,43.81 111.76,45.09 U$1.BE1 | E8.15 v86.36,41.91
  Bottom 0.406: v86.36,41.91 v109.22,41.91
SR3  (via drill 0.81)
  Top 0.406: v83.82,20.95 87.63,24.77 v87.63,60.96 | v102.87,60.96 106.68,57.15 v106.68,48.26
  Bottom 0.406: v83.82,20.95 86.36,18.41 E9.15 | v87.63,60.96 v102.87,60.96 | v106.68,48.26 111.76,48.26 U$1.BD2
SR_ENABL  (via drill 0.81)
  Top 0.406: E9.5 83.82,10.79 82.55,12.06 82.55,26.04 83.82,27.3 E8.5 83.82,28.57 82.55,29.84 v82.55,54.61 | v109.22,54.61 111.76,52.07 U$1.BC1
  Bottom 0.406: v82.55,54.61 v109.22,54.61
TT_SHIFT  (via drill 0.81)
  Top 0.406: Q1.3 R5.1 | E2.8 v91.44,105.41 91.44,107.31 92.71,108.58 92.71,117.47 91.44,118.75 E1.8
  Bottom 0.406: v91.44,105.41 62.87,105.41 61.59,106.68 Q1.3
TT_SHIFT_L  (via drill 0.81)
  Top 0.406: R4.1 R3.1 | v100.97,128.27 102.23,129.54 106.05,129.54 v106.05,125.73
  Bottom 0.406: v106.05,125.73 111.76,125.73 U$1.AB2 | R4.1 50.16,116.84 49.53,117.47 45.72,117.47 45.09,118.11 45.09,128.27 v100.97,128.27
VCC  (via drill 0.81)
  Top 0.813: E4.20 C4.1 | 69.22,127 C1.1 E1.20 73.66,124.46 v74.93,123.19 | 69.22,127 R6.2 | R2.2 50.8,94.61 49.53,95.89 49.53,103.5 48.9,104.14 48.9,124.46 50.8,126.36 R4.2 | v102.87,123.19 C1P.+ | C2P.+ 105.41,88.9 105.41,66.04 C3P.+ | E9.20 C9.1 71.12,18.41 69.85,19.68 69.85,29.84 69.22,30.48 69.22,31.11 71.12,33.02 C8.1 | C8.1 E8.20 | E2.20 C2.1 71.12,108.58 69.22,106.68 | E3.20 C3.1 71.12,90.81 69.22,88.9 | 69.22,68.58 68.58,67.94 68.58,56.52 71.12,53.98 C6.1 | 69.22,68.58 71.12,70.48 C5.1 | 69.22,68.58 69.22,88.9 | 69.22,88.9 69.22,106.68 | C8.1 71.12,36.2 71.75,36.83 71.75,46.99 73.66,48.9 E6.20 | 69.22,106.68 69.22,127
  Bottom 0.813: C1P.+ 111.76,127 U$1.AA2 | R2.2 43.81,93.98 41.27,91.44 E4.20 | R6.2 R4.2 | v74.93,123.19 v102.87,123.19 | 105.41,60.96 107.95,58.42 111.76,58.42 U$1.BA2 | 105.41,60.96 C3P.+ | C4P.+ 102.23,24.77 71.12,24.77 67.31,20.95 67.31,18.41 71.12,18.41 C9.1 | C5.1 E5.20 | E7.20 C7.1 37.47,53.34 37.47,53.98 36.83,54.61 36.83,55.88 37.47,56.52 50.8,56.52 R1.2 51.44,55.88 53.98,58.42 65.41,58.42 70.48,53.34 C6.1 E6.20 74.3,53.34 79.38,58.42 102.87,58.42 105.41,60.96

## Text on the board
Bottom: MAJOR REGISTERS M220P16